# Altium PCB power.PcbDoc (part 1 of 2)
Units mil, origin at the board's own origin, x right, y up, seen from the top; angles counter-clockwise.
Board outline 6000 x 4000 mil, 2 copper layers (Top Layer, Bottom Layer); 144 components, 0 nets, 936 pads, 0 vias.
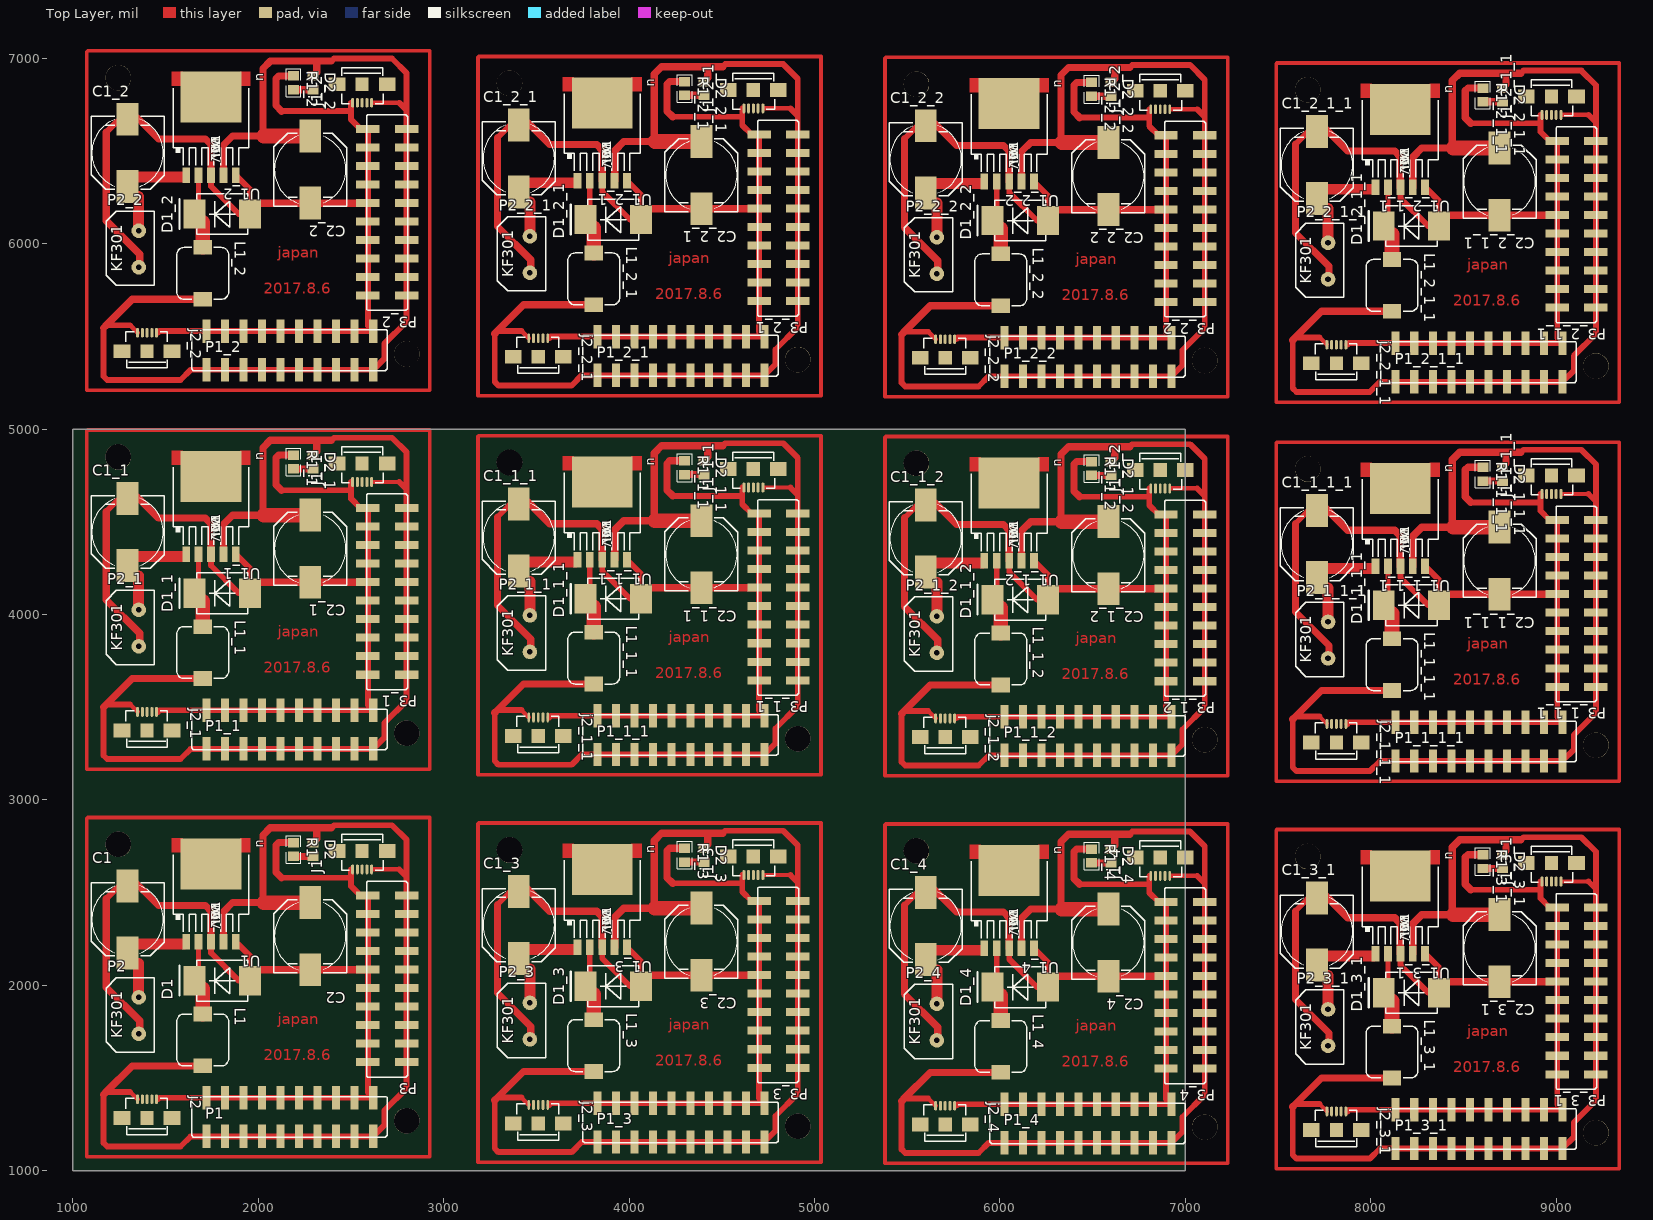
[diagram p0: Top Layer view]
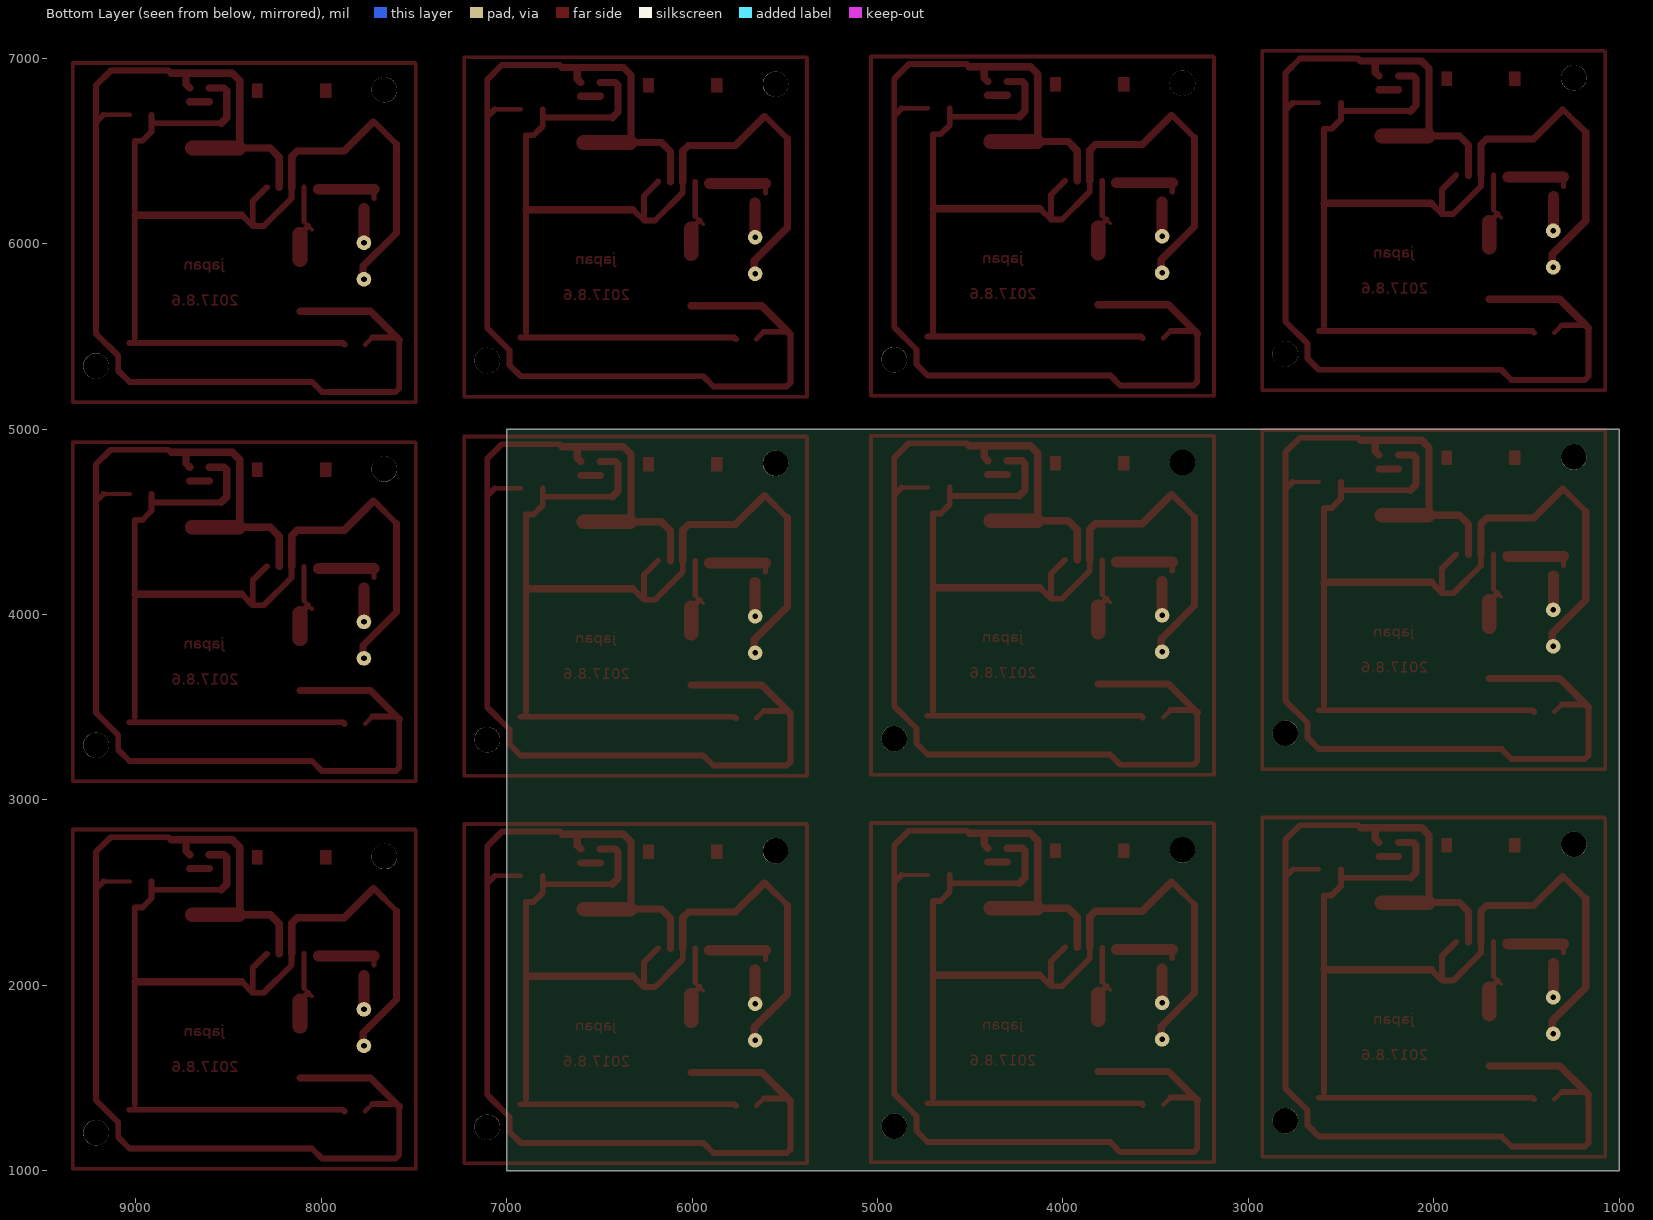
[diagram p1: Bottom Layer view, seen from below]

## Layer stack, top to bottom
Top Solder: solder mask 0.4, Solder Resist, Dk 3.5
Top Layer: signal copper 1.4
Dielectric 1: dielectric 12.6, FR-4, Dk 4.8
Bottom Layer: signal copper 1.4
Bottom Solder: solder mask 0.4, Solder Resist, Dk 3.5

## Board outline
1000,1000 7000,1000 7000,5000 1000,5000

## Design rules (kind name [scope] priority, off if disabled: settings)
Clearance [All] p1: gap=10 ignorepadtopadclearanceinfootprint=FALSE except(0: Arc-Hole Track-Hole SMDPad-Hole THPad-Hole Via-Hole Fill-Hole Poly-Hole Region-Hole Text-Hole)
PolygonConnect [All] p1: connectstyle=Relief reliefconductorwidth=10 reliefentries=4 polygonreliefangle="90 Angle" airgapwidth=10
RoutingVias [All] p1: holewidth=28 width=50 viastyle="Through Hole" minholewidth=28 minwidth=50 maxholewidth=28 maxwidth=50
SolderMaskExpansion [All] p1: expansion=4
Width [All] p1: maxlimit=10 minlimit=10 preferedwidth=10
30 further rules are at their usual default settings.

## Components (designator, comment, footprint, x,y, rotation, side; value= is the part's Value field where it differs from the comment)
C1 "Cap Pol" C-RB-S10 1295,2355 r90 top value=100uF
C1_1 "Cap Pol" C-RB-S10 1295,4445 r90 top value=100uF (schematic designator C1)
C1_1_1 "Cap Pol" C-RB-S10 3405,4415 r90 top value=100uF (schematic designator C1)
C1_1_1_1 "Cap Pol" C-RB-S10 7710,4380 r90 top value=100uF (schematic designator C1)
C1_1_2 "Cap Pol" C-RB-S10 5600,4410 r90 top value=100uF (schematic designator C1)
C1_2 "Cap Pol" C-RB-S10 1295,6490 r90 top value=100uF (schematic designator C1)
C1_2_1 "Cap Pol" C-RB-S10 3405,6460 r90 top value=100uF (schematic designator C1)
C1_2_1_1 "Cap Pol" C-RB-S10 7710,6425 r90 top value=100uF (schematic designator C1)
C1_2_2 "Cap Pol" C-RB-S10 5600,6455 r90 top value=100uF (schematic designator C1)
C1_3 "Cap Pol" C-RB-S10 3405,2325 r90 top value=100uF (schematic designator C1)
C1_3_1 "Cap Pol" C-RB-S10 7710,2290 r90 top value=100uF (schematic designator C1)
C1_4 "Cap Pol" C-RB-S10 5600,2320 r90 top value=100uF (schematic designator C1)
C2 "Cap Pol" C-RB-S10 2280,2265 r270 top value=100uF
C2_1 "Cap Pol" C-RB-S10 2280,4355 r270 top value=100uF (schematic designator C2)
C2_1_1 "Cap Pol" C-RB-S10 4390,4325 r270 top value=100uF (schematic designator C2)
C2_1_1_1 "Cap Pol" C-RB-S10 8695,4290 r270 top value=100uF (schematic designator C2)
C2_1_2 "Cap Pol" C-RB-S10 6585,4320 r270 top value=100uF (schematic designator C2)
C2_2 "Cap Pol" C-RB-S10 2280,6400 r270 top value=100uF (schematic designator C2)
C2_2_1 "Cap Pol" C-RB-S10 4390,6370 r270 top value=100uF (schematic designator C2)
C2_2_1_1 "Cap Pol" C-RB-S10 8695,6335 r270 top value=100uF (schematic designator C2)
C2_2_2 "Cap Pol" C-RB-S10 6585,6365 r270 top value=100uF (schematic designator C2)
C2_3 "Cap Pol" C-RB-S10 4390,2235 r270 top value=100uF (schematic designator C2)
C2_3_1 "Cap Pol" C-RB-S10 8695,2200 r270 top value=100uF (schematic designator C2)
C2_4 "Cap Pol" C-RB-S10 6585,2230 r270 top value=100uF (schematic designator C2)
D1 "D-Schottky" DIODE-SMC 1805,2025 r180 top
D1_1 "D-Schottky" DIODE-SMC 1805,4115 r180 top (schematic designator D1)
D1_1_1 "D-Schottky" DIODE-SMC 3915,4085 r180 top (schematic designator D1)
D1_1_1_1 "D-Schottky" DIODE-SMC 8220,4050 r180 top (schematic designator D1)
D1_1_2 "D-Schottky" DIODE-SMC 6110,4080 r180 top (schematic designator D1)
D1_2 "D-Schottky" DIODE-SMC 1805,6160 r180 top (schematic designator D1)
D1_2_1 "D-Schottky" DIODE-SMC 3915,6130 r180 top (schematic designator D1)
D1_2_1_1 "D-Schottky" DIODE-SMC 8220,6095 r180 top (schematic designator D1)
D1_2_2 "D-Schottky" DIODE-SMC 6110,6125 r180 top (schematic designator D1)
D1_3 "D-Schottky" DIODE-SMC 3915,1995 r180 top (schematic designator D1)
D1_3_1 "D-Schottky" DIODE-SMC 8220,1960 r180 top (schematic designator D1)
D1_4 "D-Schottky" DIODE-SMC 6110,1990 r180 top (schematic designator D1)
D2 "Bulle" LED_0805 2295,2732.4 r270 top
D2_1 "Bulle" LED_0805 2295,4822.4 r270 top (schematic designator D2)
D2_1_1 "Bulle" LED_0805 4405,4792.4 r270 top (schematic designator D2)
D2_1_1_1 "Bulle" LED_0805 8710,4757.4 r270 top (schematic designator D2)
D2_1_2 "Bulle" LED_0805 6600,4787.4 r270 top (schematic designator D2)
D2_2 "Bulle" LED_0805 2295,6867.4 r270 top (schematic designator D2)
D2_2_1 "Bulle" LED_0805 4405,6837.4 r270 top (schematic designator D2)
D2_2_1_1 "Bulle" LED_0805 8710,6802.4 r270 top (schematic designator D2)
D2_2_2 "Bulle" LED_0805 6600,6832.4 r270 top (schematic designator D2)
D2_3 "Bulle" LED_0805 4405,2702.4 r270 top (schematic designator D2)
D2_3_1 "Bulle" LED_0805 8710,2667.4 r270 top (schematic designator D2)
D2_4 "Bulle" LED_0805 6600,2697.4 r270 top (schematic designator D2)
J1 "USB_M" USB_MICRO 2560,2725 r180 top
J1_1 "USB_M" USB_MICRO 2560,4815 r180 top (schematic designator J1)
J1_1_1 "USB_M" USB_MICRO 4670,4785 r180 top (schematic designator J1)
J1_1_1_1 "USB_M" USB_MICRO 8975,4750 r180 top (schematic designator J1)
J1_1_2 "USB_M" USB_MICRO 6865,4780 r180 top (schematic designator J1)
J1_2 "USB_M" USB_MICRO 2560,6860 r180 top (schematic designator J1)
J1_2_1 "USB_M" USB_MICRO 4670,6830 r180 top (schematic designator J1)
J1_2_1_1 "USB_M" USB_MICRO 8975,6795 r180 top (schematic designator J1)
J1_2_2 "USB_M" USB_MICRO 6865,6825 r180 top (schematic designator J1)
J1_3 "USB_M" USB_MICRO 4670,2695 r180 top (schematic designator J1)
J1_3_1 "USB_M" USB_MICRO 8975,2660 r180 top (schematic designator J1)
J1_4 "USB_M" USB_MICRO 6865,2690 r180 top (schematic designator J1)
j2 "USB_M" USB_MICRO 1400,1285 r0 top
j2_1 "USB_M" USB_MICRO 1400,3375 r0 top (schematic designator j2)
j2_1_1 "USB_M" USB_MICRO 3510,3345 r0 top (schematic designator j2)
j2_1_1_1 "USB_M" USB_MICRO 7815,3310 r0 top (schematic designator j2)
j2_1_2 "USB_M" USB_MICRO 5705,3340 r0 top (schematic designator j2)
j2_2 "USB_M" USB_MICRO 1400,5420 r0 top (schematic designator j2)
j2_2_1 "USB_M" USB_MICRO 3510,5390 r0 top (schematic designator j2)
j2_2_1_1 "USB_M" USB_MICRO 7815,5355 r0 top (schematic designator j2)
j2_2_2 "USB_M" USB_MICRO 5705,5385 r0 top (schematic designator j2)
j2_3 "USB_M" USB_MICRO 3510,1255 r0 top (schematic designator j2)
j2_3_1 "USB_M" USB_MICRO 7815,1220 r0 top (schematic designator j2)
j2_4 "USB_M" USB_MICRO 5705,1250 r0 top (schematic designator j2)
L1 "Inductor" L-SMD-7 1700,1705 r270 top value=33uH
L1_1 "Inductor" L-SMD-7 1700,3795 r270 top value=33uH (schematic designator L1)
L1_1_1 "Inductor" L-SMD-7 3810,3765 r270 top value=33uH (schematic designator L1)
L1_1_1_1 "Inductor" L-SMD-7 8115,3730 r270 top value=33uH (schematic designator L1)
L1_1_2 "Inductor" L-SMD-7 6005,3760 r270 top value=33uH (schematic designator L1)
L1_2 "Inductor" L-SMD-7 1700,5840 r270 top value=33uH (schematic designator L1)
L1_2_1 "Inductor" L-SMD-7 3810,5810 r270 top value=33uH (schematic designator L1)
L1_2_1_1 "Inductor" L-SMD-7 8115,5775 r270 top value=33uH (schematic designator L1)
L1_2_2 "Inductor" L-SMD-7 6005,5805 r270 top value=33uH (schematic designator L1)
L1_3 "Inductor" L-SMD-7 3810,1675 r270 top value=33uH (schematic designator L1)
L1_3_1 "Inductor" L-SMD-7 8115,1640 r270 top value=33uH (schematic designator L1)
L1_4 "Inductor" L-SMD-7 6005,1670 r270 top value=33uH (schematic designator L1)
P1 "Header 10X2" Head_SOP20 1720,1185 r90 top
P1_1 "Header 10X2" Head_SOP20 1720,3275 r90 top (schematic designator P1)
P1_1_1 "Header 10X2" Head_SOP20 3830,3245 r90 top (schematic designator P1)
P1_1_1_1 "Header 10X2" Head_SOP20 8135,3210 r90 top (schematic designator P1)
P1_1_2 "Header 10X2" Head_SOP20 6025,3240 r90 top (schematic designator P1)
P1_2 "Header 10X2" Head_SOP20 1720,5320 r90 top (schematic designator P1)
P1_2_1 "Header 10X2" Head_SOP20 3830,5290 r90 top (schematic designator P1)
P1_2_1_1 "Header 10X2" Head_SOP20 8135,5255 r90 top (schematic designator P1)
P1_2_2 "Header 10X2" Head_SOP20 6025,5285 r90 top (schematic designator P1)
P1_3 "Header 10X2" Head_SOP20 3830,1155 r90 top (schematic designator P1)
P1_3_1 "Header 10X2" Head_SOP20 8135,1120 r90 top (schematic designator P1)
P1_4 "Header 10X2" Head_SOP20 6025,1150 r90 top (schematic designator P1)
P2 "Header 2" KF301_2 1355,1935 r0 top
P2_1 "Header 2" KF301_2 1355,4025 r0 top (schematic designator P2)
P2_1_1 "Header 2" KF301_2 3465,3995 r0 top (schematic designator P2)
P2_1_1_1 "Header 2" KF301_2 7770,3960 r0 top (schematic designator P2)
P2_1_2 "Header 2" KF301_2 5660,3990 r0 top (schematic designator P2)
P2_2 "Header 2" KF301_2 1355,6070 r0 top (schematic designator P2)
P2_2_1 "Header 2" KF301_2 3465,6040 r0 top (schematic designator P2)
P2_2_1_1 "Header 2" KF301_2 7770,6005 r0 top (schematic designator P2)
P2_2_2 "Header 2" KF301_2 5660,6035 r0 top (schematic designator P2)
P2_3 "Header 2" KF301_2 3465,1905 r0 top (schematic designator P2)
P2_3_1 "Header 2" KF301_2 7770,1870 r0 top (schematic designator P2)
P2_4 "Header 2" KF301_2 5660,1900 r0 top (schematic designator P2)
P3 "Header 10X2" Head_SOP20 2800,1585 r180 top
P3_1 "Header 10X2" Head_SOP20 2800,3675 r180 top (schematic designator P3)
P3_1_1 "Header 10X2" Head_SOP20 4910,3645 r180 top (schematic designator P3)
P3_1_1_1 "Header 10X2" Head_SOP20 9215,3610 r180 top (schematic designator P3)
P3_1_2 "Header 10X2" Head_SOP20 7105,3640 r180 top (schematic designator P3)
P3_2 "Header 10X2" Head_SOP20 2800,5720 r180 top (schematic designator P3)
P3_2_1 "Header 10X2" Head_SOP20 4910,5690 r180 top (schematic designator P3)
P3_2_1_1 "Header 10X2" Head_SOP20 9215,5655 r180 top (schematic designator P3)
P3_2_2 "Header 10X2" Head_SOP20 7105,5685 r180 top (schematic designator P3)
P3_3 "Header 10X2" Head_SOP20 4910,1555 r180 top (schematic designator P3)
P3_3_1 "Header 10X2" Head_SOP20 9215,1520 r180 top (schematic designator P3)
P3_4 "Header 10X2" Head_SOP20 7105,1550 r180 top (schematic designator P3)
R1 "Res1" 0805-1 2190,2732.4 r270 top value=1K
R1_1 "Res1" 0805-1 2190,4822.4 r270 top value=1K (schematic designator R1)
R1_1_1 "Res1" 0805-1 4300,4792.4 r270 top value=1K (schematic designator R1)
R1_1_1_1 "Res1" 0805-1 8605,4757.4 r270 top value=1K (schematic designator R1)
R1_1_2 "Res1" 0805-1 6495,4787.4 r270 top value=1K (schematic designator R1)
R1_2 "Res1" 0805-1 2190,6867.4 r270 top value=1K (schematic designator R1)
R1_2_1 "Res1" 0805-1 4300,6837.4 r270 top value=1K (schematic designator R1)
R1_2_1_1 "Res1" 0805-1 8605,6802.4 r270 top value=1K (schematic designator R1)
R1_2_2 "Res1" 0805-1 6495,6832.4 r270 top value=1K (schematic designator R1)
R1_3 "Res1" 0805-1 4300,2702.4 r270 top value=1K (schematic designator R1)
R1_3_1 "Res1" 0805-1 8605,2667.4 r270 top value=1K (schematic designator R1)
R1_4 "Res1" 0805-1 6495,2697.4 r270 top value=1K (schematic designator R1)
U1 "LM2596SX_ADJ_NOP" KTT0005B 1745,2445 r270 top value=Value
U1_1 "LM2596SX_ADJ_NOP" KTT0005B 1745,4535 r270 top value=Value (schematic designator U1)
U1_1_1 "LM2596SX_ADJ_NOP" KTT0005B 3855,4505 r270 top value=Value (schematic designator U1)
U1_1_1_1 "LM2596SX_ADJ_NOP" KTT0005B 8160,4470 r270 top value=Value (schematic designator U1)
U1_1_2 "LM2596SX_ADJ_NOP" KTT0005B 6050,4500 r270 top value=Value (schematic designator U1)
U1_2 "LM2596SX_ADJ_NOP" KTT0005B 1745,6580 r270 top value=Value (schematic designator U1)
U1_2_1 "LM2596SX_ADJ_NOP" KTT0005B 3855,6550 r270 top value=Value (schematic designator U1)
U1_2_1_1 "LM2596SX_ADJ_NOP" KTT0005B 8160,6515 r270 top value=Value (schematic designator U1)
U1_2_2 "LM2596SX_ADJ_NOP" KTT0005B 6050,6545 r270 top value=Value (schematic designator U1)
U1_3 "LM2596SX_ADJ_NOP" KTT0005B 3855,2415 r270 top value=Value (schematic designator U1)
U1_3_1 "LM2596SX_ADJ_NOP" KTT0005B 8160,2380 r270 top value=Value (schematic designator U1)
U1_4 "LM2596SX_ADJ_NOP" KTT0005B 6050,2410 r270 top value=Value (schematic designator U1)

## Footprints (in the part's own frame and the unit in brackets; to place one, negate y for a bottom-side part, rotate by r counter-clockwise, add the part's x,y. Pads: shape width x height; smd on the part's side, far side on the other; paste and mask are expansions set on the pad)
0805-1 [mm] "贴片带丝印"
  rect 1.3x1.5 smd: 1(-0.95,0) 2(0.95,0)
  silkscreen extent -1.91,-1.02 1.91,1.02, body extent -1.14,-0.51 1.14,0.51, height 1
C-RB-S10 [mm] "贴片电解"
  rect 4.5x3 smd: 1(-4.6,0) 2(4.6,0)
  silkscreen extent -5,-5 5,5
DIODE-SMC [mm] "贴片二极管"
  rect 3x4 smd: 1(-3.8,0) 2(3.8,0)
  silkscreen extent -3.5,-2.79 5.84,2.79, body extent -3.81,-2.79 3.94,2.79, height 1.05
Head_SOP20 [mm]
  rect 3.2x1.1 smd: 1(0,0) 2(5.3,0) 3(0,-2.54) 4(5.3,-2.54) 5(0,-5.08) 6(5.3,-5.08) 7(0,-7.62) 8(5.3,-7.62) 9(0,-10.16) 10(5.3,-10.16) 11(0,-12.7) 12(5.3,-12.7) 13(0,-15.24) 14(5.3,-15.24) 15(0,-17.78) 16(5.3,-17.78) 17(0,-20.32) 18(5.3,-20.32) 19(0,-22.86) 20(5.3,-22.86)
  silkscreen extent -0.13,-24.77 5.46,2.03
KF301_2 [mm]
  round 2 hole 0.762: 1(0,-5) 2(0,0)
  silkscreen extent -4.44,-7.49 2.16,2.67
KTT0005B [mm]
  rect 2.16x1.07 smd paste-0.102 mask+0.051: 1(5.338,-3.4) 2(5.338,-1.7) 3(5.338,0.005) 4(5.338,1.7) 5(5.338,3.4)
  rect 6.99x8.33 smd paste-0.102 mask+0.051: 6(-5.338,0)
  Top Layer region: -8.832,-3.9 -8.832,-5.4 -6.923,-5.4 -6.923,-3.9
  Top Layer region: -8.832,5.4 -8.832,4 -6.923,4 -6.923,5.4
  silkscreen extent -6.6,-5.2 4,5.2, body extent 0,0 0.25,0.25, height 0.25
L-SMD-7 [mm] "贴片电感7*7"
  rect 2x2.5 smd: 1(-3.556,0) 2(3.556,0)
  silkscreen extent -3.56,-3.56 3.56,3.56, body extent -3.56,-3.56 3.56,3.56, height 4
LED_0805 [mm] "贴片二极管"
  rect 1.3x1.5 smd: 1(-0.95,0) 2(0.95,0)
  silkscreen extent 1.91,-0.63 1.91,0.64
USB_MICRO [mm] "USB方孔"
  oct 0.4x1.35 smd: 1(-1.3,2.54) 2(-0.65,2.54) 3(0,2.54) 4(0.65,2.54) 5(1.3,2.54)
  rect 2.286x1.9 smd: 6(3.429,0) 7(-3.429,0)
  rect 1.8x1.9 smd: 8(0,0)
  silkscreen extent -2.92,-2.29 2.79,2.67

## Part data
C1 C1_1 C1_1_1 C1_1_1_1 C1_1_2 C1_2 C1_2_1 C1_2_1_1 C1_2_2 C1_3 C1_3_1 C1_4 C2 C2_1 C2_1_1 C2_1_1_1 C2_1_2 C2_2 C2_2_1 C2_2_1_1 C2_2_2 C2_3 C2_3_1 C2_4: "极性电解电容", LatestRevisionDate=17-Jul-2002, LatestRevisionNote="Re-released for DXP Platform.", PackageReference=RB7.6-15, Published=8-Jun-2000, Publisher="Altium Limited"
  C1 C1_1 C1_1_1 C1_1_1_1 C1_1_2 C1_2 C1_2_1 C1_2_1_1 C1_2_2 C1_3 C1_3_1 C1_4: Vol=35V
  C2 C2_1 C2_1_1 C2_1_1_1 C2_1_2 C2_2 C2_2_1 C2_2_1_1 C2_2_2 C2_3 C2_3_1 C2_4: Vol=16V
D1 D1_1 D1_1_1 D1_1_1_1 D1_1_2 D1_2 D1_2_1 D1_2_1_1 D1_2_2 D1_3 D1_3_1 D1_4: "肖特基二极管", Code_JEDEC=DO-214-AA, LatestRevisionDate=17-Jul-2002, LatestRevisionNote="Re-released for DXP Platform.", PackageReference=SMB, Published=8-Jun-2000, Publisher="Altium Limited", Type=SS14
D2 D2_1 D2_1_1 D2_1_1_1 D2_1_2 D2_2 D2_2_1 D2_2_1_1 D2_2_2 D2_3 D2_3_1 D2_4: library part LED0, "发光二极管", LatestRevisionDate=08-Jul-2005, LatestRevisionNote="Mech Layer 1 removed.", PackageReference=LED-0, Published=8-Jun-2000, Publisher="Altium Limited"
J1 J1_1 J1_1_1 J1_1_1_1 J1_1_2 J1_2 J1_2_1 J1_2_1_1 J1_2_2 J1_3 J1_3_1 J1_4 j2 j2_1 j2_1_1 j2_1_1_1 j2_1_2 j2_2 j2_2_1 j2_2_1_1 j2_2_2 j2_3 j2_3_1 j2_4: "MicroUSB接口"
L1 L1_1 L1_1_1 L1_1_1_1 L1_1_2 L1_2 L1_2_1 L1_2_1_1 L1_2_2 L1_3 L1_3_1 L1_4: "电感", Code_IEC=1005, Code_JEITA=0402, LatestRevisionDate=17-Jul-2002, LatestRevisionNote="Re-released for DXP Platform.", PackageReference=0402-A, Published=8-Jun-2000, Publisher="Altium Limited"
P1 P1_1 P1_1_1 P1_1_1_1 P1_1_2 P1_2 P1_2_1 P1_2_1_1 P1_2_2 P1_3 P1_3_1 P1_4: "Header, 10-Pin", LatestRevisionDate=17-Jul-2002, LatestRevisionNote="Re-released for DXP Platform.", Publisher="Altium Limited"
P2 P2_1 P2_1_1 P2_1_1_1 P2_1_2 P2_2 P2_2_1 P2_2_1_1 P2_2_2 P2_3 P2_3_1 P2_4: "Header, 2-Pin", LatestRevisionDate=17-Jul-2002, LatestRevisionNote="Re-released for DXP Platform.", Publisher="Altium Limited"
P3 P3_1 P3_1_1 P3_1_1_1 P3_1_2 P3_2 P3_2_1 P3_2_1_1 P3_2_2 P3_3 P3_3_1 P3_4: "Header, 10-Pin, Dual row", LatestRevisionDate=17-Jul-2002, LatestRevisionNote="Re-released for DXP Platform.", Publisher="Altium Limited"
R1 R1_1 R1_1_1 R1_1_1_1 R1_1_2 R1_2 R1_2_1 R1_2_1_1 R1_2_2 R1_3 R1_3_1 R1_4: "贴片电阻", LatestRevisionDate=17-Jul-2002, LatestRevisionNote="Re-released for DXP Platform.", PackageReference=AXIAL-0.4, Published=8-Jun-2000, Publisher="Altium Limited"
U1 U1_1 U1_1_1 U1_1_1_1 U1_1_2 U1_2 U1_2_1 U1_2_1_1 U1_2_2 U1_3 U1_3_1 U1_4: "Imported", Alternate_PartNumber=LM2596S-ADJ/NOPB, Manufacturer="Texas Instruments", PartNumber=LM2596SX-ADJ/NOPB, CompType=IC, MountType=SMT, PackageReference=KTT0005B, PIN_COUNT=6, RefDes=RefDes, RoHS=Y, Type=TYPE

## Free pads (board coordinates)
  round 137.8 hole 137.8 unplated: 1(2800,1270) 1(2800,3360) 1(2800,5405) 1(4910,1240) 1(4910,3330) 1(4910,5375) 1(7105,1235) 1(7105,3325) 1(7105,5370) 1(9215,1205) 1(9215,3295) 1(9215,5340) 2(1245,2760) 2(1245,4850) 2(1245,6895) 2(3355,2730) 2(3355,4820) 2(3355,6865) 2(5550,2725) 2(5550,4815) 2(5550,6860) 2(7660,2695) 2(7660,4785) 2(7660,6830)

## Nets (pads, with @x,y where several pads share a name; then routed paths per layer and width w, separated by ;. In a path a pad name is that pad's centre, name@x,y a point inside that pad or via, vN(x,y) a via of type N, cw(c..) or ccw(c..) an arc to the next point about the centre after c; other vN are vias at no path point)
pads on no net: C1.1 C1.2 C1_1.1 C1_1.2 C1_1_1.1 C1_1_1.2 C1_1_1_1.1 C1_1_1_1.2 C1_1_2.1 C1_1_2.2 C1_2.1 C1_2.2 C1_2_1.1 C1_2_1.2 C1_2_1_1.1 C1_2_1_1.2 C1_2_2.1 C1_2_2.2 C1_3.1 C1_3.2 C1_3_1.1 C1_3_1.2 C1_4.1 C1_4.2 C2.1 C2.2 C2_1.1 C2_1.2 C2_1_1.1 C2_1_1.2 C2_1_1_1.1 C2_1_1_1.2 C2_1_2.1 C2_1_2.2 C2_2.1 C2_2.2 C2_2_1.1 C2_2_1.2 C2_2_1_1.1 C2_2_1_1.2 C2_2_2.1 C2_2_2.2 C2_3.1 C2_3.2 C2_3_1.1 C2_3_1.2 C2_4.1 C2_4.2 D1.1 D1.2 D1_1.1 D1_1.2 D1_1_1.1 D1_1_1.2 D1_1_1_1.1 D1_1_1_1.2 D1_1_2.1 D1_1_2.2 D1_2.1 D1_2.2 D1_2_1.1 D1_2_1.2 D1_2_1_1.1 D1_2_1_1.2 D1_2_2.1 D1_2_2.2 D1_3.1 D1_3.2 D1_3_1.1 D1_3_1.2 D1_4.1 D1_4.2 D2.1 D2.2 D2_1.1 D2_1.2 D2_1_1.1 D2_1_1.2 D2_1_1_1.1 D2_1_1_1.2 D2_1_2.1 D2_1_2.2 D2_2.1 D2_2.2 D2_2_1.1 D2_2_1.2 D2_2_1_1.1 D2_2_1_1.2 D2_2_2.1 D2_2_2.2 D2_3.1 D2_3.2 D2_3_1.1 D2_3_1.2 D2_4.1 D2_4.2 J1.1 J1.2 J1.3 J1.4 J1.5 J1.6 J1.7 J1.8 J1_1.1 J1_1.2 J1_1.3 J1_1.4 J1_1.5 J1_1.6 J1_1.7 J1_1.8 J1_1_1.1 J1_1_1.2 J1_1_1.3 J1_1_1.4 J1_1_1.5 J1_1_1.6 J1_1_1.7 J1_1_1.8 J1_1_1_1.1 J1_1_1_1.2 J1_1_1_1.3 J1_1_1_1.4 J1_1_1_1.5 J1_1_1_1.6 J1_1_1_1.7 J1_1_1_1.8 J1_1_2.1 J1_1_2.2 J1_1_2.3 J1_1_2.4 J1_1_2.5 J1_1_2.6 J1_1_2.7 J1_1_2.8 J1_2.1 J1_2.2 J1_2.3 J1_2.4 J1_2.5 J1_2.6 J1_2.7 J1_2.8 J1_2_1.1 J1_2_1.2 J1_2_1.3 J1_2_1.4 J1_2_1.5 J1_2_1.6 J1_2_1.7 J1_2_1.8 J1_2_1_1.1 J1_2_1_1.2 J1_2_1_1.3 J1_2_1_1.4 J1_2_1_1.5 J1_2_1_1.6 J1_2_1_1.7 J1_2_1_1.8 J1_2_2.1 J1_2_2.2 J1_2_2.3 J1_2_2.4 J1_2_2.5 J1_2_2.6 J1_2_2.7 J1_2_2.8 J1_3.1 J1_3.2 J1_3.3 J1_3.4 J1_3.5 J1_3.6 J1_3.7 J1_3.8 J1_3_1.1 J1_3_1.2 J1_3_1.3 J1_3_1.4 J1_3_1.5 J1_3_1.6 J1_3_1.7 J1_3_1.8 J1_4.1 J1_4.2 J1_4.3 J1_4.4 J1_4.5 J1_4.6 J1_4.7 J1_4.8 j2.1 j2.2 j2.3 j2.4 j2.5 j2.6 j2.7 j2.8 j2_1.1 j2_1.2 j2_1.3 j2_1.4 j2_1.5 j2_1.6 j2_1.7 j2_1.8 j2_1_1.1 j2_1_1.2 j2_1_1.3 j2_1_1.4 j2_1_1.5 j2_1_1.6 j2_1_1.7 j2_1_1.8 j2_1_1_1.1 j2_1_1_1.2 j2_1_1_1.3 j2_1_1_1.4 j2_1_1_1.5 j2_1_1_1.6 j2_1_1_1.7 j2_1_1_1.8 j2_1_2.1 j2_1_2.2 j2_1_2.3 j2_1_2.4 j2_1_2.5 j2_1_2.6 j2_1_2.7 j2_1_2.8 j2_2.1 j2_2.2 j2_2.3 j2_2.4 j2_2.5 j2_2.6 j2_2.7 j2_2.8 j2_2_1.1 j2_2_1.2 j2_2_1.3 j2_2_1.4 j2_2_1.5 j2_2_1.6 j2_2_1.7 j2_2_1.8 j2_2_1_1.1 j2_2_1_1.2 j2_2_1_1.3 j2_2_1_1.4 j2_2_1_1.5 j2_2_1_1.6 j2_2_1_1.7 j2_2_1_1.8 j2_2_2.1 j2_2_2.2 j2_2_2.3 j2_2_2.4 j2_2_2.5 j2_2_2.6 j2_2_2.7 j2_2_2.8 j2_3.1 j2_3.2 j2_3.3 j2_3.4 j2_3.5 j2_3.6 j2_3.7 j2_3.8 j2_3_1.1 j2_3_1.2 j2_3_1.3 j2_3_1.4 j2_3_1.5 j2_3_1.6 j2_3_1.7 j2_3_1.8 j2_4.1 j2_4.2 j2_4.3 j2_4.4 j2_4.5 j2_4.6 j2_4.7 j2_4.8 L1.1 L1.2 L1_1.1 L1_1.2 L1_1_1.1 L1_1_1.2 L1_1_1_1.1 L1_1_1_1.2 L1_1_2.1 L1_1_2.2 L1_2.1 L1_2.2 L1_2_1.1 L1_2_1.2 L1_2_1_1.1 L1_2_1_1.2 L1_2_2.1 L1_2_2.2 L1_3.1 L1_3.2 L1_3_1.1 L1_3_1.2 L1_4.1 L1_4.2 P1.1 P1.2 P1.3 P1.4 P1.5 P1.6 P1.7 P1.8 P1.9 P1.10 P1.11 P1.12 P1.13 P1.14 P1.15 P1.16 P1.17 P1.18 P1.19 P1.20 P1_1.1 P1_1.2 P1_1.3 P1_1.4 P1_1.5 P1_1.6 P1_1.7 P1_1.8 P1_1.9 P1_1.10 P1_1.11 P1_1.12 P1_1.13 P1_1.14 P1_1.15 P1_1.16 P1_1.17 P1_1.18 P1_1.19 P1_1.20 P1_1_1.1 P1_1_1.2 P1_1_1.3 P1_1_1.4 P1_1_1.5 P1_1_1.6 P1_1_1.7 P1_1_1.8 P1_1_1.9 P1_1_1.10 P1_1_1.11 P1_1_1.12 P1_1_1.13 P1_1_1.14 P1_1_1.15 P1_1_1.16 P1_1_1.17 P1_1_1.18 P1_1_1.19 P1_1_1.20 P1_1_1_1.1 P1_1_1_1.2 P1_1_1_1.3 P1_1_1_1.4 P1_1_1_1.5 P1_1_1_1.6 P1_1_1_1.7 P1_1_1_1.8 P1_1_1_1.9 P1_1_1_1.10 P1_1_1_1.11 P1_1_1_1.12 P1_1_1_1.13 P1_1_1_1.14 P1_1_1_1.15 P1_1_1_1.16 P1_1_1_1.17 P1_1_1_1.18 P1_1_1_1.19 P1_1_1_1.20 P1_1_2.1 P1_1_2.2 P1_1_2.3 P1_1_2.4 P1_1_2.5 P1_1_2.6 P1_1_2.7 P1_1_2.8 P1_1_2.9 P1_1_2.10 P1_1_2.11 P1_1_2.12 P1_1_2.13 P1_1_2.14 P1_1_2.15 P1_1_2.16 P1_1_2.17 P1_1_2.18 P1_1_2.19 P1_1_2.20 P1_2.1 P1_2.2 P1_2.3 P1_2.4 P1_2.5 P1_2.6 P1_2.7 P1_2.8 P1_2.9 P1_2.10 P1_2.11 P1_2.12 P1_2.13 P1_2.14 P1_2.15 P1_2.16 P1_2.17 P1_2.18 P1_2.19 P1_2.20 P1_2_1.1 P1_2_1.2 P1_2_1.3 P1_2_1.4 P1_2_1.5 P1_2_1.6 P1_2_1.7 P1_2_1.8 P1_2_1.9 P1_2_1.10 P1_2_1.11 P1_2_1.12 P1_2_1.13 P1_2_1.14 P1_2_1.15 P1_2_1.16 P1_2_1.17 P1_2_1.18 P1_2_1.19 P1_2_1.20 P1_2_1_1.1 P1_2_1_1.2 P1_2_1_1.3 P1_2_1_1.4 P1_2_1_1.5 P1_2_1_1.6 P1_2_1_1.7 P1_2_1_1.8 P1_2_1_1.9 P1_2_1_1.10 P1_2_1_1.11 P1_2_1_1.12 P1_2_1_1.13 P1_2_1_1.14 P1_2_1_1.15 P1_2_1_1.16 P1_2_1_1.17 P1_2_1_1.18 P1_2_1_1.19 P1_2_1_1.20 P1_2_2.1 P1_2_2.2 P1_2_2.3 P1_2_2.4 P1_2_2.5 P1_2_2.6 P1_2_2.7 P1_2_2.8 P1_2_2.9 P1_2_2.10 P1_2_2.11 P1_2_2.12 P1_2_2.13 P1_2_2.14 P1_2_2.15 P1_2_2.16 P1_2_2.17 P1_2_2.18 P1_2_2.19 P1_2_2.20 P1_3.1 P1_3.2 P1_3.3 P1_3.4 P1_3.5 P1_3.6 P1_3.7 P1_3.8 P1_3.9 P1_3.10 P1_3.11 P1_3.12 P1_3.13 P1_3.14 P1_3.15 P1_3.16 P1_3.17 P1_3.18 P1_3.19 P1_3.20 P1_3_1.1 P1_3_1.2 P1_3_1.3 P1_3_1.4 P1_3_1.5 P1_3_1.6 P1_3_1.7 P1_3_1.8 P1_3_1.9 P1_3_1.10 P1_3_1.11 P1_3_1.12 P1_3_1.13 P1_3_1.14 P1_3_1.15 P1_3_1.16 P1_3_1.17 P1_3_1.18 P1_3_1.19 P1_3_1.20 P1_4.1 P1_4.2 P1_4.3 P1_4.4 P1_4.5 P1_4.6 P1_4.7 P1_4.8 P1_4.9 P1_4.10 P1_4.11 P1_4.12 P1_4.13 P1_4.14 P1_4.15 P1_4.16 P1_4.17 P1_4.18 P1_4.19 P1_4.20 P2.1 P2.2 P2_1.1 P2_1.2 P2_1_1.1 P2_1_1.2 P2_1_1_1.1 P2_1_1_1.2 P2_1_2.1 P2_1_2.2 P2_2.1 P2_2.2 P2_2_1.1 P2_2_1.2 P2_2_1_1.1 P2_2_1_1.2 P2_2_2.1 P2_2_2.2 P2_3.1 P2_3.2 P2_3_1.1 P2_3_1.2 P2_4.1 P2_4.2 P3.1 P3.2 P3.3 P3.4 P3.5 P3.6 P3.7 P3.8 P3.9 P3.10 P3.11 P3.12 P3.13 P3.14 P3.15 P3.16 P3.17 P3.18 P3.19 P3.20 P3_1.1 P3_1.2 P3_1.3 P3_1.4 P3_1.5 P3_1.6 P3_1.7 P3_1.8 P3_1.9 P3_1.10 P3_1.11 P3_1.12 P3_1.13 P3_1.14 P3_1.15 P3_1.16 P3_1.17 P3_1.18 P3_1.19 P3_1.20 P3_1_1.1 P3_1_1.2 P3_1_1.3 P3_1_1.4 P3_1_1.5 P3_1_1.6 P3_1_1.7 P3_1_1.8 P3_1_1.9 P3_1_1.10 P3_1_1.11 P3_1_1.12 P3_1_1.13 P3_1_1.14 P3_1_1.15 P3_1_1.16 P3_1_1.17 P3_1_1.18 P3_1_1.19 P3_1_1.20 P3_1_1_1.1 P3_1_1_1.2 P3_1_1_1.3 P3_1_1_1.4 P3_1_1_1.5 P3_1_1_1.6 P3_1_1_1.7 P3_1_1_1.8 P3_1_1_1.9 P3_1_1_1.10 P3_1_1_1.11 P3_1_1_1.12 P3_1_1_1.13 P3_1_1_1.14 P3_1_1_1.15 P3_1_1_1.16 P3_1_1_1.17 P3_1_1_1.18 P3_1_1_1.19 P3_1_1_1.20 P3_1_2.1 P3_1_2.2 P3_1_2.3 P3_1_2.4 P3_1_2.5 P3_1_2.6 P3_1_2.7 P3_1_2.8 P3_1_2.9 P3_1_2.10 P3_1_2.11 P3_1_2.12 P3_1_2.13 P3_1_2.14 P3_1_2.15 P3_1_2.16 P3_1_2.17 P3_1_2.18 P3_1_2.19 P3_1_2.20 P3_2.1 P3_2.2 P3_2.3 P3_2.4 P3_2.5 P3_2.6 P3_2.7 P3_2.8 P3_2.9 P3_2.10 P3_2.11 P3_2.12 P3_2.13 P3_2.14 P3_2.15 P3_2.16 P3_2.17 P3_2.18 P3_2.19 P3_2.20 P3_2_1.1 P3_2_1.2 P3_2_1.3 P3_2_1.4 P3_2_1.5 P3_2_1.6 P3_2_1.7 P3_2_1.8 P3_2_1.9 P3_2_1.10 P3_2_1.11 P3_2_1.12 P3_2_1.13 P3_2_1.14 P3_2_1.15 P3_2_1.16 P3_2_1.17 P3_2_1.18 P3_2_1.19 P3_2_1.20 P3_2_1_1.1 P3_2_1_1.2 P3_2_1_1.3 P3_2_1_1.4 P3_2_1_1.5 P3_2_1_1.6 P3_2_1_1.7 P3_2_1_1.8 P3_2_1_1.9 P3_2_1_1.10 P3_2_1_1.11 P3_2_1_1.12 P3_2_1_1.13 P3_2_1_1.14 P3_2_1_1.15 P3_2_1_1.16 P3_2_1_1.17 P3_2_1_1.18 P3_2_1_1.19 P3_2_1_1.20 P3_2_2.1 P3_2_2.2 P3_2_2.3 P3_2_2.4 P3_2_2.5 P3_2_2.6 P3_2_2.7 P3_2_2.8 P3_2_2.9 P3_2_2.10 P3_2_2.11 P3_2_2.12 P3_2_2.13 P3_2_2.14 P3_2_2.15 P3_2_2.16 P3_2_2.17 P3_2_2.18 P3_2_2.19 P3_2_2.20 P3_3.1 P3_3.2 P3_3.3 P3_3.4 P3_3.5 P3_3.6 P3_3.7 P3_3.8 P3_3.9 P3_3.10 P3_3.11 P3_3.12 P3_3.13 P3_3.14 P3_3.15 P3_3.16 P3_3.17 P3_3.18 P3_3.19 P3_3.20 P3_3_1.1 P3_3_1.2 P3_3_1.3 P3_3_1.4 P3_3_1.5 P3_3_1.6 P3_3_1.7 P3_3_1.8 P3_3_1.9 P3_3_1.10 P3_3_1.11 P3_3_1.12 P3_3_1.13 P3_3_1.14 P3_3_1.15 P3_3_1.16 P3_3_1.17 P3_3_1.18 P3_3_1.19 P3_3_1.20 P3_4.1 P3_4.2 P3_4.3 P3_4.4 P3_4.5 P3_4.6 P3_4.7 P3_4.8 P3_4.9 P3_4.10 P3_4.11 P3_4.12 P3_4.13 P3_4.14 P3_4.15 P3_4.16 P3_4.17 P3_4.18 P3_4.19 P3_4.20 R1.1 R1.2 R1_1.1 R1_1.2 R1_1_1.1 R1_1_1.2 R1_1_1_1.1 R1_1_1_1.2 R1_1_2.1 R1_1_2.2 R1_2.1 R1_2.2 R1_2_1.1 R1_2_1.2 R1_2_1_1.1 R1_2_1_1.2 R1_2_2.1 R1_2_2.2 R1_3.1 R1_3.2 R1_3_1.1 R1_3_1.2 R1_4.1 R1_4.2 U1.1 U1.2 U1.3 U1.4 U1.5 U1.6 U1_1.1 U1_1.2 U1_1.3 U1_1.4 U1_1.5 U1_1.6 U1_1_1.1 U1_1_1.2 U1_1_1.3 U1_1_1.4 U1_1_1.5 U1_1_1.6 U1_1_1_1.1 U1_1_1_1.2 U1_1_1_1.3 U1_1_1_1.4 U1_1_1_1.5 U1_1_1_1.6 U1_1_2.1 U1_1_2.2 U1_1_2.3 U1_1_2.4 U1_1_2.5 U1_1_2.6 U1_2.1 U1_2.2 U1_2.3 U1_2.4 U1_2.5 U1_2.6 U1_2_1.1 U1_2_1.2 U1_2_1.3 U1_2_1.4 U1_2_1.5 U1_2_1.6 U1_2_1_1.1 U1_2_1_1.2 U1_2_1_1.3 U1_2_1_1.4 U1_2_1_1.5 U1_2_1_1.6 U1_2_2.1 U1_2_2.2 U1_2_2.3 U1_2_2.4 U1_2_2.5 U1_2_2.6 U1_3.1 U1_3.2 U1_3.3 U1_3.4 U1_3.5 U1_3.6 U1_3_1.1 U1_3_1.2 U1_3_1.3 U1_3_1.4 U1_3_1.5 U1_3_1.6 U1_4.1 U1_4.2 U1_4.3 U1_4.4 U1_4.5 U1_4.6